# Altium PCB PCBMC.PcbDoc
Units mil, origin at the board's own origin, x right, y up, seen from the top; angles counter-clockwise.
Board outline 2490 x 3315 mil, 2 copper layers (Top Layer, Bottom Layer); 24 components, 29 nets, 150 pads, 27 vias.
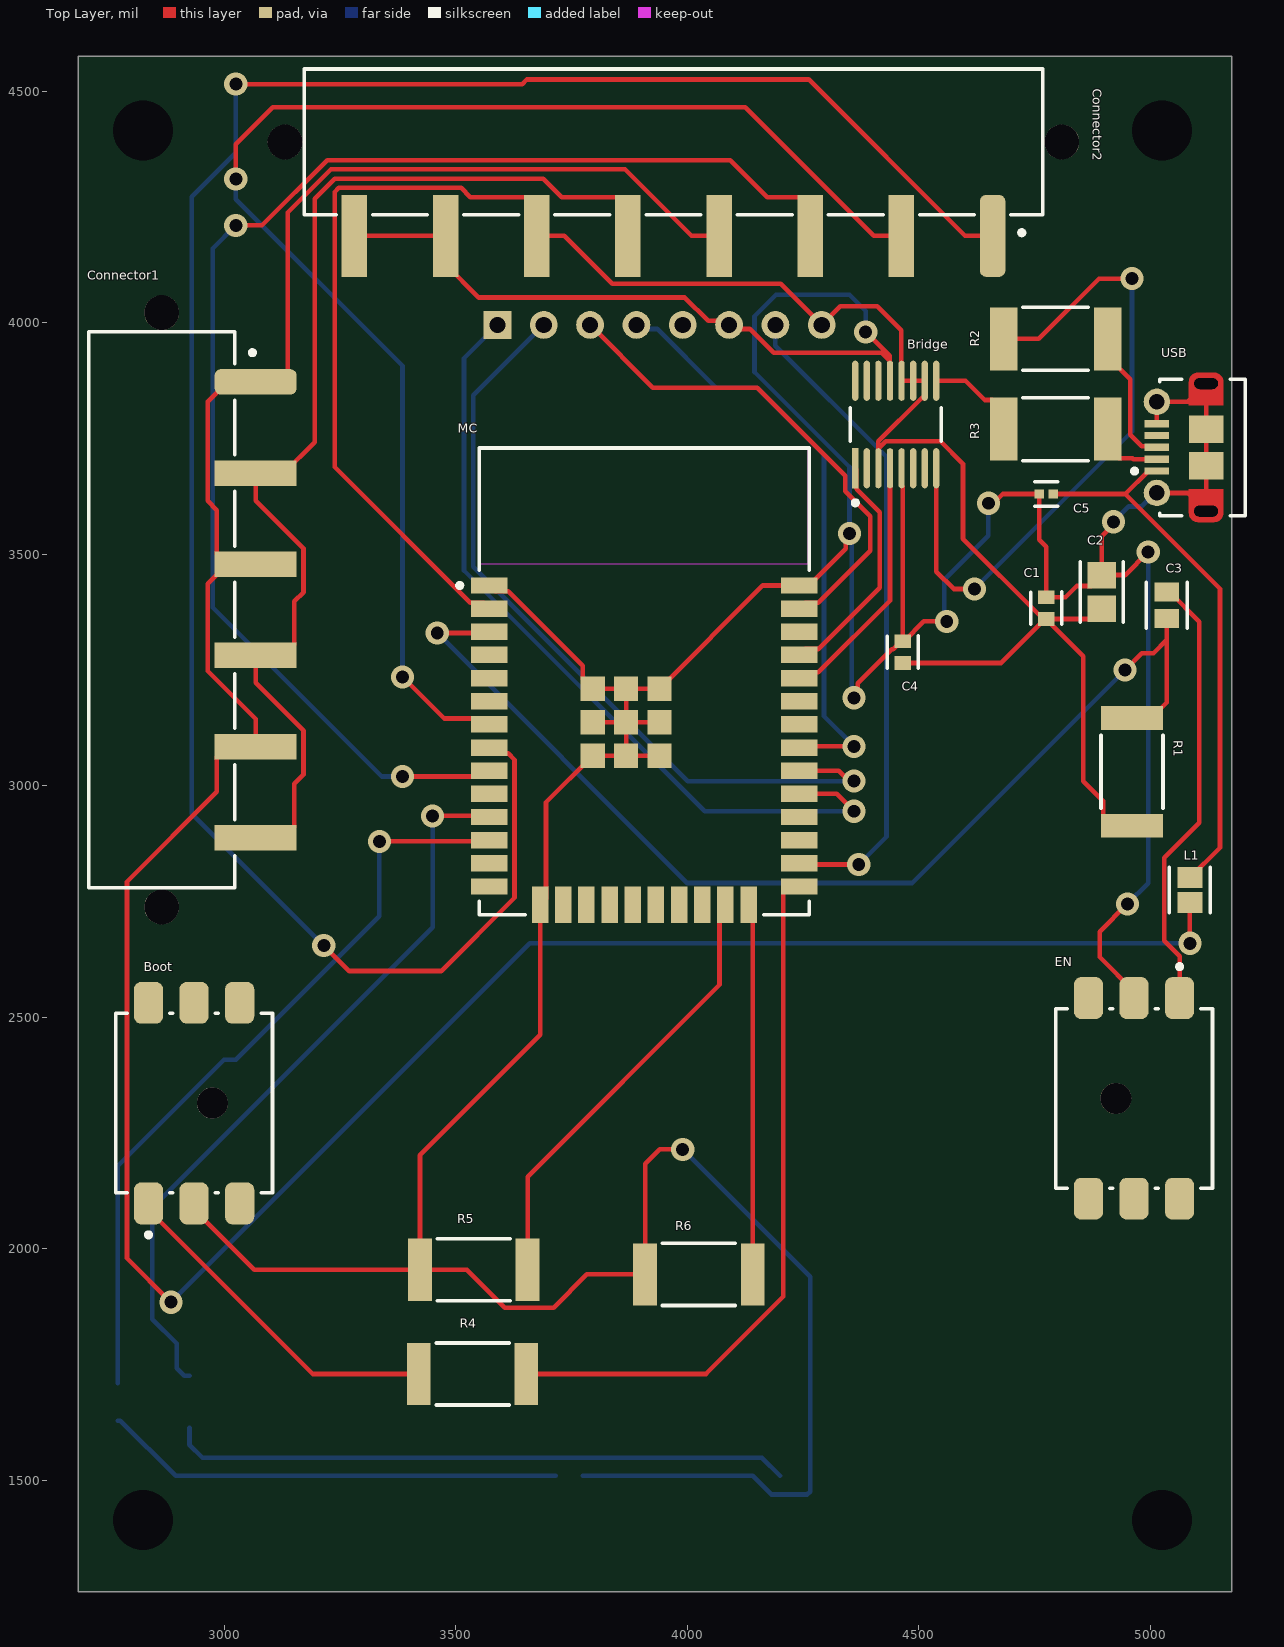
[diagram p0: Top Layer view]
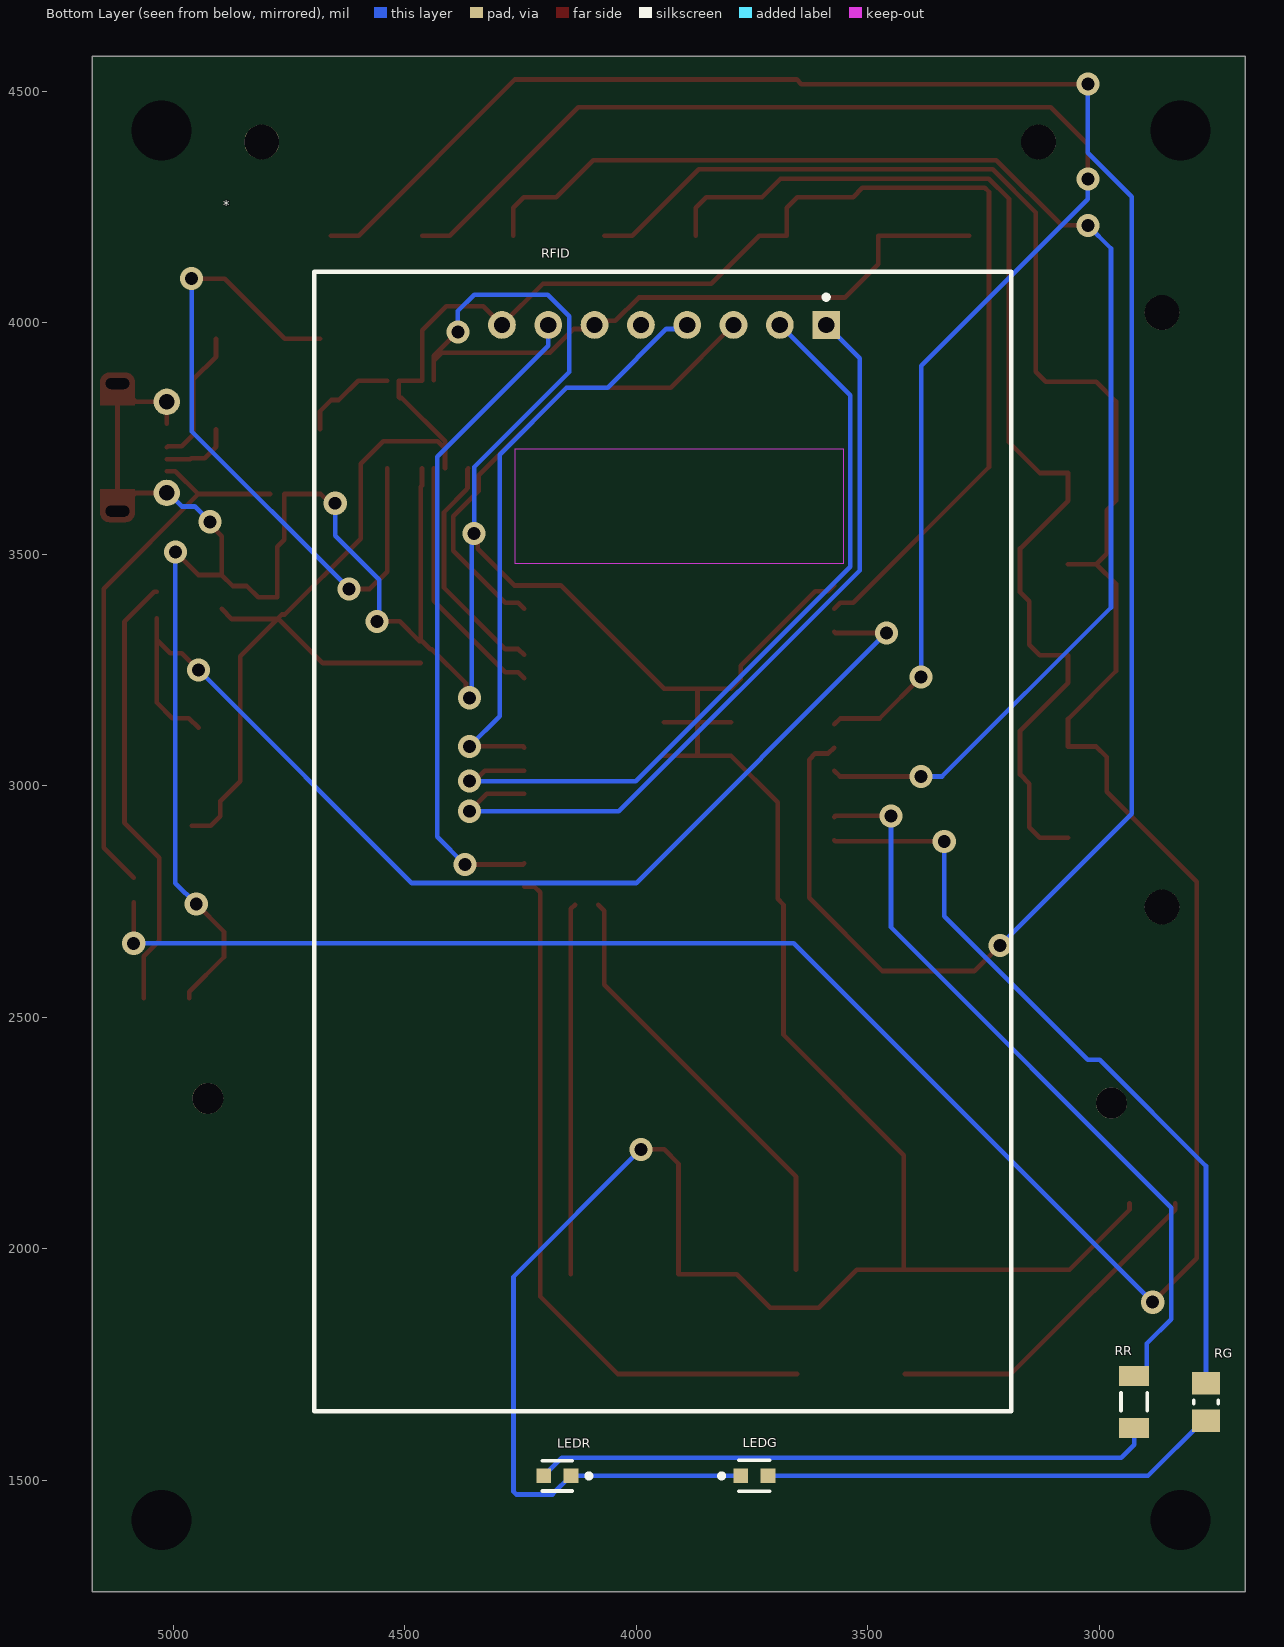
[diagram p1: Bottom Layer view, seen from below]
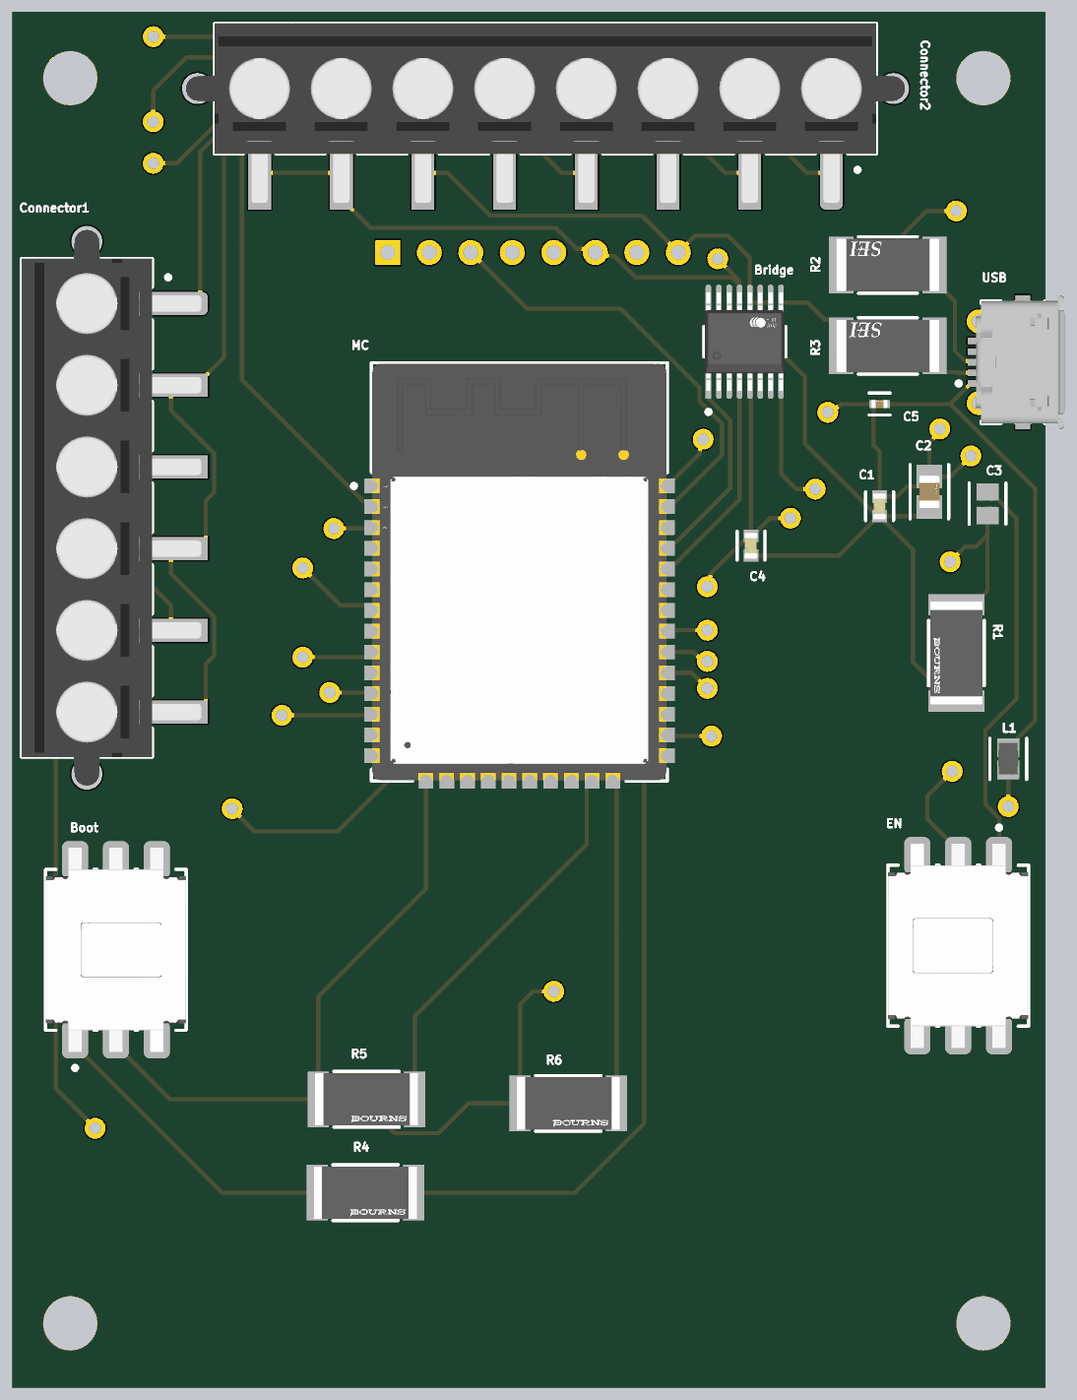
[diagram p2: 3D render of the assembled board from above, using the file's embedded part models]

## Layer stack, top to bottom
Top Solder: solder mask 0.4, Solder Resist, Dk 3.5
Top Layer: signal copper 1.4
Dielectric 1: dielectric 12.6, FR-4, Dk 4.8
Bottom Layer: signal copper 1.4
Bottom Solder: solder mask 0.4, Solder Resist, Dk 3.5

## Board outline
2685,1260 5175,1260 5175,4575 2685,4575

## Design rules (kind name [scope] priority, off if disabled: settings)
Clearance [All] p1: gap=5 ignorepadtopadclearanceinfootprint=FALSE except(0: Arc-Hole Track-Hole SMDPad-Hole THPad-Hole Via-Hole Fill-Hole Poly-Hole Region-Hole Text-Hole)
HoleSize [All] p1: absolutevalues=TRUE maxlimit=250 minlimit=10 maxpercent=80.000 minpercent=20.000
PolygonConnect [All] p1: connectstyle=Relief reliefconductorwidth=10 reliefentries=4 polygonreliefangle="90 Angle" airgapwidth=10
RoutingVias [All] p1: holewidth=28 width=50 viastyle="Through Hole" minholewidth=28 minwidth=50 maxholewidth=28 maxwidth=50
SolderMaskExpansion [All] p1: expansion=4 istentingtop=FALSE
Width [All] p1: maxlimit=20 minlimit=5 preferedwidth=10 minimp=50.000000 maximp=50.000000 favimp=50.000000
29 further rules are at their usual default settings.

## Components (designator, comment, footprint, x,y, rotation, side; value= is the part's Value field where it differs from the comment)
* "RFID" PCBComponent_1 4290,3995 r180 bottom
Boot "ESB-33535A" FP-ESB-33535A-MFG 2935,2315 r90 top
Bridge "FT230XS-R" FP-SSOP-16-MFG 4450,3780 r90 top
C1 "C0603C104K5RACTU" FP-C0603C-CF-MFG 4775,3383.62 r90 top value="0.10 μF"
C2 "GRM21BR61H106KE43L" FP-GRM21B-0_2-e0_2_0_7-IPC_A 4895,3418.55 r90 top
C3 "CL21B105KBFNNNG" FP-CL21-IPC_C 5035,3390 r270 top
C4 "C0603C104K5RACTU" FP-C0603C-CF-MFG 4465,3288.62 r90 top value="0.10 μF"
C5 "CL05B103KB5NNNC" FP-CL165-IPC_C 4775,3630 r180 top
Connector1 "691709710306" 691709710306 2865,3380 r270 top
Connector2 "691709710308" 691709710308 3970,4390 r180 top
EN "ESB-33535A" FP-ESB-33535A-MFG 4964.37,2325 r270 top
L1 "ILHB0805ER601V" FP-ILHB-0805-IPC_C 5085,2775 r270 top
LEDG "LTST-C190GKT" FP-LTST-C190GKT-MFG 3745,1510 r180 bottom
LEDR "LTST-C190KRKT" FP-LTST-C190KRKT-MFG 4170.47,1510 r0 bottom
MC "ESP32-WROOM-32" FP-ESP32-WROOM-32-MFG 3907.13,3225.43 r0 top
R1 "CR2512-JW-103ELF" FP-CR2512-IPC_B 4960,3030 r270 top
R2 "RMCF2512JT27R0" FP-RMCF2512-IPC_B 4795,3965 r180 top
R3 "RMCF2512JT27R0" FP-RMCF2512-IPC_B 4795,3770 r180 top
R4 "CR2512-JW-103ELF" FP-CR2512-IPC_B 3536.17,1730 r0 top
R5 "CR2512-JW-103ELF" FP-CR2512-IPC_B 3538.83,1955 r0 top
R6 "CR2512-JW-103ELF" FP-CR2512-IPC_B 4025,1945 r0 top
RG "RK73B2ATTD390J" RESC2013X60X30ML20T20 2770,1669.65 r90 bottom
RR "ERJ-8ENF52R3V" RESC3216X70X50NL05T20 2925,1670 r90 bottom
USB "105017-0001" USB-MICRO-B_V 5066.85,3730.63 r90 top

## Footprints (in the part's own frame and the unit in brackets; to place one, negate y for a bottom-side part, rotate by r counter-clockwise, add the part's x,y. Pads: shape width x height; smd on the part's side, far side on the other; paste and mask are expansions set on the pad)
691709710306 [mm] "Horizontal Entry SMT with Pressure Clamp, pitch 5mm, 06p"
  rrect50% 1.4x4.5 smd: 1(-12.5,5.15)
  rect 1.4x4.5 smd: 2(-7.5,5.15) 3(-2.5,5.15) 4(2.5,5.15) 5(7.5,5.15) 6(12.5,5.15)
  round 1.9 hole 1.9 unplated: M1(-16.3,0) M2(16.3,0)
  silkscreen extent -15.25,-4 15.25,5.1, body extent -17,-4 17,7, height 9.95
691709710308 [mm] "Horizontal Entry SMT with Pressure Clamp, pitch 5mm, 08p"
  rrect50% 1.4x4.5 smd: 1(-17.5,5.15)
  rect 1.4x4.5 smd: 2(-12.5,5.15) 3(-7.5,5.15) 4(-2.5,5.15) 5(2.5,5.15) 6(7.5,5.15) 7(12.5,5.15) 8(17.5,5.15)
  round 1.9 hole 1.9 unplated: M1(-21.3,0) M2(21.3,0)
  silkscreen extent -20.25,-4 20.25,5.1, body extent -22,-4 22,7, height 9.95
FP-C0603C-CF-MFG [mm]
  rect 0.75x0.9 smd paste+0 mask+0: 1(-0.6,0) 2(0.6,0)
  silkscreen extent -0.87,-0.85 0.88,0.85, body extent -1.2,-0.6 1.2,0.6, height 0.25
FP-CL21-IPC_C [mil]
  rect 41.52x53.39 smd paste+0 mask+0: 1(-28.57,0) 2(28.57,0)
  silkscreen extent -49,-44 49,44, body extent -53,-32 53,32, height 10
FP-CL165-IPC_C [mil]
  rect 20.29x18.6 smd paste+0 mask+0: 1(-14.9,0) 2(14.9,0)
  silkscreen extent -25,-27 25,27, body extent -29,-15 29,15, height 10
FP-CR2512-IPC_B [mil]
  rect 51.36x134.1 smd paste+0 mask+0: 1(-116.17,0) 2(116.17,0)
  silkscreen extent -79,-67 79,67, body extent -152,-77 152,77, height 10
FP-ESB-33535A-MFG [mm]
  rrect50% 2.3x1.6 smd paste+0 mask+0: 1(-5.5,2.5) 2(-5.5,0) 3(-5.5,-2.5) 4(5.5,-2.5) 5(5.5,0) 6(5.5,2.5)
  round 1.7 hole 1.7 unplated paste-1000 mask+0: ""(0,-1)
  silkscreen extent -7.35,-4.3 4.92,4.3, body extent -6.75,-4.4 6.75,4.4, height 0.25
FP-ESP32-WROOM-32-MFG [mm]
  rect 2x0.9 smd paste+0 mask+0: 1(-8.5,5.26) 2(-8.5,3.99) 3(-8.5,2.72) 4(-8.5,1.45) 5(-8.5,0.18) 6(-8.5,-1.09) 7(-8.5,-2.36) 8(-8.5,-3.63) 9(-8.5,-4.9) 10(-8.5,-6.17) 11(-8.5,-7.44) 12(-8.5,-8.71) 13(-8.5,-9.98) 14(-8.5,-11.25) 25(8.5,-11.25) 26(8.5,-9.98) 27(8.5,-8.71) 28(8.5,-7.44) 29(8.5,-6.17) 30(8.5,-4.9) 31(8.5,-3.63) 32(8.5,-2.36) 33(8.5,-1.09) 34(8.5,0.18) 35(8.5,1.45) 36(8.5,2.72) 37(8.5,3.99) 38(8.5,5.26)
  rect 0.9x2 smd paste+0 mask+0: 15(-5.715,-12.25) 16(-4.445,-12.25) 17(-3.175,-12.25) 18(-1.905,-12.25) 19(-0.635,-12.25) 20(0.635,-12.25) 21(1.905,-12.25) 22(3.175,-12.25) 23(4.445,-12.25) 24(5.715,-12.25)
  rect 1.33x1.33 smd paste+0 mask+0: 39(-2.835,-4.075) 39(-2.835,-2.24) 39(-2.835,-0.405) 39(-1,-4.075) 39(-1,-2.24) 39(-1,-0.405) 39(0.835,-4.075) 39(0.835,-2.24) 39(0.835,-0.405)
  Keep-Out Layer region: -9,6.45 9,6.45 9,12.75 -9,12.75
  Keep-Out Layer region: -9,6.45 9,6.45 9,12.75 -9,12.75
  silkscreen extent -10.25,-12.8 9.05,12.8, body extent -9.6,-13.35 9.6,12.9, height 0.25
FP-GRM21B-0_2-e0_2_0_7-IPC_A [mil]
  rect 57.27x61.27 smd paste+0 mask+0: 1(-36.45,0) 2(36.45,0)
  silkscreen extent -65,-46 65,46, body extent -85,-50 85,50, height 10
FP-ILHB-0805-IPC_C [mil]
  rect 45.45x53.39 smd paste+0 mask+0: 1(-26.61,0) 2(26.61,0)
  silkscreen extent -49,-44 49,44, body extent -53,-32 53,32, height 10
FP-LTST-C190GKT-MFG [mm]
  rect 0.8x0.8 smd paste+0 mask+0: 1(-0.75,0) 2(0.75,0)
  silkscreen extent -1.92,-0.85 0.85,0.85, body extent -0.8,-0.4 0.8,0.4, height 0.9
FP-LTST-C190KRKT-MFG [mm]
  rect 0.8x0.8 smd paste+0 mask+0: 1(-0.75,0) 2(0.75,0)
  silkscreen extent -1.85,-0.82 0.82,0.82, body extent -0.8,-0.4 0.8,0.4, height 0.9
FP-RMCF2512-IPC_B [mil]
  rect 59.22x136.02 smd paste+0 mask+0: 1(-112.24,0) 2(112.24,0)
  silkscreen extent -71,-68 71,68, body extent -152,-78 152,78, height 10
FP-SSOP-16-MFG [mm]
  rect 2.2x0.345 smd paste+0 mask+0: 1(-2.4,2.222)
  rrect100% 2.2x0.345 smd paste+0 mask+0: 2(-2.4,1.587) 3(-2.4,0.952) 4(-2.4,0.317) 5(-2.4,-0.318) 6(-2.4,-0.953) 7(-2.4,-1.588) 8(-2.4,-2.222) 9(2.4,-2.222) 10(2.4,-1.587) 11(2.4,-0.952) 12(2.4,-0.317) 13(2.4,0.318) 14(2.4,0.953) 15(2.4,1.588) 16(2.4,2.222)
  silkscreen extent -4.42,-2.5 0.92,2.5, body extent -3.6,-2.75 3.6,2.75, height 0.25
PCBComponent_1 [mil]
  rect 60x60 hole 35: 1(700,0)
  round 60 hole 35: 2(600,0) 3(500,0) 4(400,0) 5(300,0) 6(200,0) 7(100,0) 8(0,0)
  silkscreen extent -405,-2345 1100,115
RESC2013X60X30ML20T20 [mm] "Chip Resistor, 2-Leads, Body 2.00x1.25mm, IPC Low Density"
  rect 1.25x1.55 smd: 1(-1.025,0) 2(1.025,0)
  silkscreen extent -0.1,-0.67 0.1,0.67, body extent -1.1,-0.72 1.1,0.72, height 0.6
RESC3216X70X50NL05T20 [mm] "Chip Resistor, 2-Leads, Body 3.20x1.60mm, IPC Medium Density"
  rect 1.1x1.65 smd: 1(-1.425,0) 2(1.425,0)
  silkscreen extent -0.5,-0.72 0.5,0.72, body extent -1.63,-0.82 1.62,0.82, height 0.7
USB-MICRO-B_V [mm] "USB, MICRO B, Body 7.491x4.695 mm, Pitch 0.65 mm"
  rect 0.4x1.35 smd: 1(-1.3,1.35) 2(-0.65,1.35) 3(0,1.35) 4(0.65,1.35) 5(1.3,1.35)
  round 1.45 hole 0.85: 6(-2.5,1.35) 7(2.5,1.35)
  rrect50% 0x0 hole 0.6 slot 1.3 at 90 deg: 8(-3.5,-1.35) 11(3.5,-1.35)
  rect 1.5x1.9 smd: 9(-1,-1.35) 10(1,-1.35)
  Top Layer circle w0.5: c3.6,-0.9 r0.25
  Top Layer circle w0.5: c3.6,-1.8 r0.25
  Top Layer circle w0.5: c-3.6,-0.9 r0.25
  Top Layer circle w0.5: c-3.6,-1.8 r0.25
  Top Layer region: -2.3,-2.3 -2.3,-0.4 -3.6,-0.4 -3.6,-2.3
  Top Layer region: 2.3,-0.4 2.3,-2.3 3.6,-2.3 3.6,-0.4
  Top Layer region: 3.6,-0.9 3.6,-1.8 4.1,-1.8 4.1,-0.9
  Top Layer region: -3.6,-1.8 -3.6,-0.9 -4.1,-0.9 -4.1,-1.8
  silkscreen extent -3.75,-3.5 3.75,2.7, body extent -4.1,-3.9 4.1,1.5, height 2.67

## Part data
*: library part Component_1
Boot EN: library part CMP-05613-000001-1, "SWITCH PUSH DPDT 0.2A 14V", Case/Package=SMD/SMT, Max Voltage Rating (DC)=14V, Mount="Surface Mount", Packaging="Tape and Reel", Radiation Hardening=No, Termination=Solder, Throw Configuration=DPDT
Bridge: library part CMP-0248-00026-3, "IC USB SERIAL BASIC UART 16SSOP", Case/Package=SSOP, Max Operating Temperature=85°C, Max Supply Voltage=5.5V, Min Operating Temperature=-40°C, Min Supply Voltage=2.97V, Operating Supply Current=8mA, Operating Supply Voltage=5V, Package Quantity=3000, Data Rate=12Mbps, Height=0.059inch, Interface=UART, Length=5mm, Mount="Surface Mount", Number of Channels=1, Number of Pins=16, Packaging="Tape and Reel", Weight=0.004586oz, Width=0.157inch
C1 C4: library part CMP-2006-03061-2, "CAP CER 0.1UF 50V X7R 0603", Capacitance="0.10 μF", Manufacturer=KEMET, Package=C0603C-CF, Temperature="-55°C to +125°C", Temperature Characteristic=X7R, Temperature Coefficient=30ppm/°C, Temperature Range High=+125°C, Temperature Range Low=-55°C, Tolerance=0.1, Voltage Rating="50 V", Automotive=Yes, Automotive Grade="Grade 1", Category=Cap, ComponentLink2Description=Datasheet, ComponentLink2URL=https://api.kemet.com/component-edge/download/datasheet/C0603C100J5GACAUTO.pdf, Device Class L1="Passive Components", Device Class L2=Capacitors, Device Class L3="Ceramic Capacitors", Digikey Description="CAP CER 0.1UF 50V X7R 0603", Height=0.87mm, Lead Free=Yes, Manufacturer Part Number=C0603C104K5RACTU, Material=Ceramic, Octopart=https://octopart.com/c0603c104k5ractu-kemet-139244, RoHS=TRUE
C2: library part CMP-06035-004402-1, "Chip Multilayer Ceramic Capacitors for General Purpose, 0805, 10uF, X5R, 15%, 10%, 50V", Capacitance=10uF, Dielectric=X5R, Tolerance=10%, Voltage Rating (DC)=50V, Length=2mm, Thickness=1.25mm, Width=1.25mm
C3: library part CMP-13271-001433-1, "CL21 Series 0805 1uF 50V ±10% Tolerance X7R Multilayer Ceramic Chip Capacitor", Capacitance=1uF, Case Code (Imperial)=0805, Case Code (Metric)=2012, Dielectric=X7R, Max Operating Temperature=125°C, Min Operating Temperature=-55°C, Package Quantity=3000, Tolerance=10%, Voltage=50V, Case/Package=0805, Contact Plating=Tin, Depth=1.25mm, Length=2mm, Material=Ceramic, Mount="Surface Mount", Packaging="Tape and Reel", Termination=Wraparound, Thickness=0.053inch, Voltage Rating=50V, Width=0.049inch
C5: library part CMP-13271-000387-1, "Cap Ceramic 10nF 50V X7R ±10% SMD 0402 +125°C Paper T/R", Capacitance=10nF, Case Code (Imperial)=0402, Case Code (Metric)=1005, Dielectric=X7R, Max Operating Temperature=125°C, Min Operating Temperature=-55°C, Package Quantity=1, Tolerance=10%, Voltage=50V, Case/Package=0402, Contact Plating=Tin, Depth=0.5mm, Height=0.5mm, Lead Free="Lead Free", Length=1mm, Material=Ceramic, Mount="Surface Mount", Packaging="Tape and Reel", Radiation Hardening=No, Thickness=0.022inch, Voltage Rating=50V, Voltage Rating (DC)=50V, Width=0.02inch
Connector1: library part CMP-1502-03339-2, Color=Black, Current=6A, Flammability Rating="UL94 V-0", Max Operating Temperature=130°C, Min Operating Temperature=-40°C, Voltage=300V, Connector Type=Screw, Contact Material=Nickel, Contact Plating=Tin, Current Rating=6A, Height=10.2mm, Housing Material=Nylon, Lead Pitch=5mm, Length=30mm, Mount="Surface Mount", NexarPartId=34171773, Number of contacts=6, Number of Levels=1, Number of Pins=6, Number of Positions=6, Number of Positions Per Level=6, Number of Rows=1, Packaging="Tape & Reel (TR)", Pitch=5mm, Plating=Steel, REACH SVHC=Unknown, RoHS=Compliant, Termination=Screw, Voltage Rating=300V, Wire Gauge (Max)=30AWG, Wire Gauge (Min)=14AWG, Wire/Cable Gauge=30AWG
Connector2: library part CMP-1502-03340-2, Color=Black, Current=6A, Flammability Rating="UL94 V-0", Max Operating Temperature=130°C, Min Operating Temperature=-40°C, Voltage=300V, Connector Type=Screw, Contact Plating=Tin, Current Rating=6A, Housing Material=Nylon, Lead Pitch=5mm, Length=40mm, Mount="Surface Mount", NexarPartId=34171774, Number of contacts=8, Number of Levels=1, Number of Pins=8, Number of Positions=8, Number of Positions Per Level=8, Packaging="Tape & Reel (TR)", Pitch=5mm, Plating=Steel, REACH SVHC=Unknown, RoHS=Compliant, Termination=Screw, Voltage Rating=300V, Wire Gauge (Max)=30AWG, Wire Gauge (Min)=14AWG, Wire/Cable Gauge=30AWG
L1: library part CMP-02428-000001-1, "FERRITE BEAD 600 OHM 0805 1LN", Impedance At Frequency="600Ω @ 100MHz", Manufacturer=Vishay, Package=ILHB-0805, Rms Current=2000mA, Series Resistance=0.1Ω, Temperature="-55°C to +125°C", Temperature Range High=+125°C, Temperature Range Low=-55°C, Test Frequency=100MHz, Tolerance=25%, Automotive=No, Category=FBead, ComponentLink2Description=Datasheet, ComponentLink2URL=http://www.vishay.com/docs/34102/ilhb.pdf, Device Class L1="Passive Components", Device Class L2="EMI / RFI Components", Device Class L3="Ferrite Beads and Chips", Digikey Description="FERRITE BEAD 600 OHM 0805 1LN", Height=1.1mm, Ipc Land Pattern Name=CAPC200125X90, Lead Free=Yes, Manufacturer Part Number=ILHB0805ER601V, Mouser Description="Ferrite Beads Multi-Layer High Current 600Ohm 25% 100MHz 2A 100mOhm DCR 0805 T/R", Octopart=https://octopart.com/ilhb0805er601v-vishay-39650184, RoHS=TRUE, Shielding=true
LEDG: library part CMP-22017-000005-2, "LED GREEN CLEAR CHIP SMD", Case Code (Imperial)=0603, Case Code (Metric)=1608, Color=Green, Forward Current=30mA, Forward Voltage=2.1V, Lens Color=Colorless, Max Operating Temperature=85°C, Min Operating Temperature=-55°C, Package Quantity=1, Power Dissipation=100mW, Reverse Voltage=5V, Test Current=10mA, Voltage=2V, Case/Package=0603, Depth=0.8mm, Dominant Wavelength=569nm, Height=0.8mm, Illumination Color=Green, Lead Free="Lead Free", Length=1.6mm, Lens Style=Clear, Lens Transparency=Clear, Luminous Intensity=6mcd, Mount="Surface Mount", Number of Elements=1, Number of LEDs=1, Number of Pins=2, Packaging="Tape and Reel", Power Rating=100mW, Radiation Hardening=No, Viewing Angle=130°, Wavelength=565nm, Width=0.8mm
LEDR: library part CMP-1674-00011-2, "LED RED CLEAR CHIP SMD", Case Code (Imperial)=0603, Case Code (Metric)=1608, Color=Red, Forward Current=30mA, Forward Voltage=2.4V, Lens Color=Colorless, Max Operating Temperature=85°C, Min Operating Temperature=-55°C, Package Quantity=1, Power Dissipation=75mW, Reverse Voltage=5V, Test Current=20mA, Case/Package=0603, Depth=0.8mm, Dominant Wavelength=631nm, Height=0.8mm, Illumination Color=Red, Lead Free="Lead Free", Length=1.6mm, Lens Style=Diffused, Lens Transparency=Clear, Luminous Intensity=54mcd, Mount="Surface Mount", Number of Elements=1, Number of LEDs=1, Number of Pins=2, Packaging="Tape and Reel", Power Rating=75mW, Radiation Hardening=No, Viewing Angle=130°, Wavelength=639nm, Width=0.8mm
MC: library part CMP-194065-000008-1, "RX TXRX MOD WIFI SURFACE MOUNT", Case/Package=SMD/SMT, Frequency=2.5GHz, Max Operating Temperature=85°C, Min Operating Temperature=-40°C, Operating Supply Voltage=3.6V, Package Quantity=550, Data Rate=150Mbps, Mount="Surface Mount", Packaging="Cut Tape", Sensitivity=-98dBm, Weight=0.088185oz
R1 R4 R5 R6: library part CMP-1018-00098-2, "Thick Film Chip Resistors 2512 10kΩ 1W 5% 200ppm/°C", Case Code (Imperial)=2512, Case Code (Metric)=6332, Max Operating Temperature=155°C, Max Power Dissipation=1W, Min Operating Temperature=-55°C, Package Quantity=4000, Resistance=10kR, Temperature Coefficient=200ppm/°C, Tolerance=5%, Voltage Rating=200V, Case/Package=2512, Composition="Thick Film", Contact Plating=Tin, Depth=3.1mm, Height=0.03inch, Length=6.3mm, Military Standard=Not, Mount="Surface Mount", Number of Terminations=2, Packaging="Tape and Reel", Power Rating=1W, Radiation Hardening=No, Termination=SMD/SMT, Weight=0.001429oz, Width=0.122inch
R2 R3: library part CMP-26527-001789-1, "27Ω ±5% 1W 2512 Thick Film Chip Resistor AEC-Q200 compliant", Case Code (Imperial)=2512, Case Code (Metric)=6432, Max Operating Temperature=155°C, Max Power Dissipation=1W, Min Operating Temperature=-55°C, Package Quantity=4000, Resistance=27R, Resistor Type="Thick Film", Temperature Coefficient=100ppm/°C, Tolerance=5%, Case/Package=2512, Construction=Rectangular, Contact Plating=Tin, Depth=3.2mm, Features="Automotive AEC-Q200", Height=0.028inch, Lead Free="Lead Free", Length=0.248inch, Military Standard=Not, Mount="Surface Mount", Number of Terminations=2, Packaging="Tape and Reel", Power Rating=1W, Radiation Hardening=No, RoHS Compliant=Yes, Series=RMCF, Size Code=2512, Width=0.126inch
RG: library part CMP-2001-04588-1, Manufacturer="KOA Speer", Part Number=RK73B2ATTD390J
RR: library part CMP-2003-00414-1, Manufacturer=Panasonic, Part Number=ERJ-8ENF52R3V
USB: library part CMP-2000-05827-1, "Micro-USB B Receptacle, Right Angle, Bottom Mount, Surface Mount, with Solder Tabs, -30 to 85 degC, 5-Pin USB, RoHS, Tape and Reel", Manufacturer=Molex, Package Description="5-Leads USB, Micro B, Body 7.5 x 5 mm, Pitch 0.65 mm", Package Reference=MICRO-B, Package Version="Rev. F, 12/2012", Standard Package=1, Voltage - Max=30V, 3D Model=105017-0001.stp, Catalog Drawings=1050170001, Category=Connectors,Interconnects, Circuits=5, Connector Type=USB-microB, Datasheet URL=http://www.molex.com/elqNow/elqRedir.htm?ref=http://www.molex.com/webdocs/datasheets/pdf/en-us/1050170001_IO_CONNECTORS.pdf, Datasheet Version=03/2016, Family=USB,DVI,HDMIConnectors, Featured Product=Micro-USBConnectorsUSBConnectors, Features=Shielded,SolderRetention, Gender=Receptacle, Ingress Protection=-, Manufacturer URL=http://www.molex.com/, Mating Products=WM17145-ND-CABLEMICROUSBBTOSTDA1.0MWM17147-ND-CABLEMICROUSBBTOSTDA2.0MWM17146-ND-CABLEMICROUSBBTOSTDA1.5M, Mounting Technology=SurfaceMount, Mounting Type=BoardCutout,SurfaceMount,RightAngle, Number of contacts=5, Online Catalog=Molex-MicroUSB, Other Names=WM1399DKR, Package URL=http://www.molex.com/pdm_docs/sd/1050170001_sd.pdf, Packaging=Digi-Reel®, PCN Assembly/Origin=ResinSupplier21/Oct/2015, RoHS Information=1050170001CertofCompliance, Series=-, Specifications=-

## Free pads (board coordinates)
  round 60 hole 130: 3(2825,1415) 3(2825,4415) 3(5025,1415) 3(5025,4415)

## Via types
v1: diameter 50, hole 28, Top Layer to Bottom Layer, 27 vias

## Nets (pads, with @x,y where several pads share a name; then routed paths per layer and width w, separated by ;. In a path a pad name is that pad's centre, name@x,y a point inside that pad or via, vN(x,y) a via of type N, cw(c..) or ccw(c..) an arc to the next point about the centre after c; other vN are vias at no path point)
Net*_1: *.1 MC.29 | length 1751.3
  Top Layer w10: MC.29 4322.48,2982.52 v1(4360,2945)
  Bottom Layer w10: *.1 3517.8,3922.8 3517.8,3464.87 4037.67,2945 v1(4360,2945)
Net*_2: *.2 MC.30 | length 1726.5
  Top Layer w10: MC.30 4326.66,3032.52 4349.18,3010 v1(4360,3010)
  Bottom Layer w10: *.2 3537.8,3842.8 3537.8,3473.16 4000.95,3010 v1(4360,3010)
Net*_3: *.3 MC.37 | length 1075
  Top Layer w10: *.3 3925.48,3859.52 4150.55,3859.52 4340.71,3669.36 4340.71,3635.99 4395,3581.7 4395,3507.45 4282.79,3395.24 4254.49,3395.24 MC.37
Net*_4: *.4 MC.31 | length 1297.2
  Top Layer w10: MC.31 4244.25,3085 v1(4360,3085)
  Bottom Layer w10: *.4 3898.64,3986.36 3935,3986.36 4061.84,3859.52 4150.55,3859.52 4295,3715.07 4295,3150 v1(4360,3085)
Net*_6: *.6 Boot.2 Bridge.5 Bridge.13 C1.2 C2.2 C4.2 C5.2 Connector2.7 Connector2.8 EN.2 LEDG.1 LEDR.1 MC.1 MC.15 MC.38 MC.39 R5.1 R6.1 USB.5 USB.6 USB.7 USB.8 USB.9 USB.10 USB.11 | length 11611.7
  Top Layer w10: Boot.2 2935,2084.69 3064.69,1955 R5.1 ; Connector2.8 Connector2.7 3477.87,4126.22 3549.98,4054.11 3994.53,4054.11 4045,4003.64 4081.36,4003.64 *.6 4098.64,3986.36 4135,3986.36 4186.36,3935 4419.32,3935 Bridge.13@4436.81,3917.51 ; MC.1 3585.2,3419.8 3613.5,3419.8 3774.33,3258.97 3774.33,3230.67 3795.51,3209.49 MC.39@3867.76,3209.49 ; MC.39@3795.51,3137.24 MC.39@3867.76,3137.24 ; MC.39@3940,3065 MC.39@3867.76,3065 ; MC.39@3940,3137.24 MC.39@3867.76,3137.24 ; v1(3990,2215) 3940,2215 3908.83,2183.83 R6.1 3783.17,1945 3711.12,1872.95 3606.14,1872.95 3524.09,1955 R5.1 ; v1(4350,3545) 4342.35,3537.35 4342.35,3511.44 4263.43,3432.52 4163.03,3432.52 3940,3209.49 MC.39@3867.76,3209.49 ; v1(4360,3190) 4367.65,3197.65 4367.65,3221.35 4441.07,3294.76 4444.57,3294.76 4462.05,3312.24 C4.2 ; v1(4385,3980) 4436.81,3928.19 Bridge.13@4436.81,3917.51 ; Bridge.13@4436.81,3875.17 Bridge.13@4436.81,3917.51 ; Bridge.5 4462.5,3648.03 4465,3645.53 C4.2 ; v1(4560,3355) 4510.71,3355 4467.95,3312.24 C4.2 ; v1(4650,3610) 4660.82,3610 4680.82,3630 C5.2 4760.1,3531.14 4775,3516.23 C1.2 4816.48,3407.24 4840.6,3431.37 4871.37,3431.37 C2.2 ; v1(4920,3570) 4920,3563.43 4895,3538.43 C2.2 ; v1(4950,2745) 4890,2685 4890,2630.31 4965,2555.31 EN.2@4965,2541.54 ; v1(4995,3505) 4945,3455 C2.2 ; USB.6 5080.63,3632.2 USB.8 USB.9 USB.10 USB.11 5080.63,3829.06 USB.7 USB.5 ; R5.1 3422.66,2202.66 3682.13,2462.13 MC.15 3694.84,2755.87 3694.84,2964.33 3795.51,3065 MC.39@3867.76,3065 ; MC.39@3867.76,3065 MC.39@3867.76,3137.24 ; MC.39@3867.76,3137.24 MC.39@3867.76,3209.49
  Bottom Layer w10: LEDG.1 LEDR.1 4180.94,1470 4259.14,1470 4265,1475.86 4265,1940 v1(3990,2215) ; v1(4360,3190) 4355,3195 4355,3540 v1(4350,3545) 4350,3688.36 4145,3893.36 4145,4013.64 4191.36,4060 4350,4060 4385,4025 v1(4385,3980) ; v1(4560,3355) 4555,3360 4555,3444.59 4650,3539.59 v1(4650,3610) ; v1(4920,3570) 4953.13,3603.13 4981.2,3603.13 5010.27,3632.2 USB.6 ; v1(4950,2745) 4995,2790 v1(4995,3505)
Net*_7: *.7 MC.26 | length 1418.5
  Top Layer w10: MC.26 4244.29,2830 v1(4370,2830)
  Bottom Layer w10: *.7 4190,3950 4430,3710 4430,2890 v1(4370,2830)
Net*_8: *.8 Bridge.3 Bridge.10 Bridge.11 Bridge.12 C1.1 C2.1 C4.1 Connector2.6 MC.2 R1.2 | length 4560.7
  Top Layer w10: MC.2 3559.76,3395.24 3531.46,3395.24 3238.46,3688.24 3238.46,4282.04 3247.25,4290.83 3511.65,4290.83 3531.65,4270.83 3652.17,4270.83 3674.72,4248.27 Connector2.6 3734.22,4187.24 3837.8,4083.66 4201.34,4083.66 *.8 4330,4035 4410,4035 4461.81,3983.19 4461.81,3875.17 Bridge.12 Bridge.11 Bridge.10 4512.5,3838.94 4510.85,3837.29 4505.97,3837.29 4412.5,3743.82 Bridge.3 4413.19,3686.2 4413.19,3728.53 4428.47,3743.82 4546.53,3743.82 4595,3695.35 4595,3533.55 4758.79,3369.76 4765.24,3369.76 C1.1 ; C4.1 4677.05,3265 4772.05,3360 C1.1 ; C2.1 4872.9,3360 C1.1 ; R1.2 4918.63,2913.83 4897.95,2934.51 4897.95,2967.05 4855,3010 4855,3280 C1.1
NetBoot_1: Boot.1 R4.1 | length 744.1
  Top Layer w10: Boot.1 2836.57,2084.69 3191.26,1730 R4.1
NetBridge_1: Bridge.1 MC.35 | length 513.1
  Top Layer w10: MC.35 4254.49,3295.24 4282.79,3295.24 4415,3427.45 4415,3590.68 4365.71,3639.97 4365.71,3641.35 4364.29,3642.76 4364.29,3683.72 Bridge.1
NetBridge_4: Bridge.4 MC.34 | length 550.6
  Top Layer w10: MC.34 4254.49,3245.24 4282.79,3245.24 4437.5,3399.95 Bridge.4
NetBridge_8: Bridge.8 R2.2 | length 1463
  Top Layer w10: Bridge.8 4537.5,3462.5 4575,3425 v1(4620,3425) ; R2.2 4758.68,3965 4888.68,4095 v1(4960,4095)
  Bottom Layer w10: v1(4620,3425) 4960,3765 v1(4960,4095)
NetBridge_9: Bridge.9 R3.2 | length 211
  Top Layer w10: Bridge.9 4600.51,3874.49 4641.99,3833.01 4658.15,3833.01 4682.76,3808.4 R3.2
NetC3_1: C3.1 EN.1 | length 954.4
  Top Layer w10: C3.1 5040.94,3418.57 5105,3354.51 5105,2920 5030,2845 5030,2665.5 5063.43,2632.08 EN.1@5063.43,2541.54
NetC3_2: C3.2 MC.3 R1.1 | length 2424
  Top Layer w10: v1(3460,3330) 3569.96,3330 MC.3 ; R1.1@4945,3125 4966.17,3146.17 5001.37,3146.17 5035,3179.8 5035,3315 ; v1(4945,3250) 4981.33,3286.33 5006.33,3286.33 5035,3315 ; C3.2 5035,3315
  Bottom Layer w10: v1(3460,3330) 4000,2790 4485,2790 v1(4945,3250)
NetC5_1: C5.1 L1.1 USB.1 | length 1184.3
  Top Layer w10: C5.1 4945.55,3630 ; USB.1 4995,3679.45 4945.55,3630 ; L1.1 5150,2866.61 5150,3425.55 4945.55,3630
NetConnector1_1: Connector1.1 Connector1.3 Connector1.5 Connector2.4 L1.2 | length 6455.9
  Top Layer w10: v1(2885,1885) 2790.08,1979.92 2790.08,2792.81 2984.17,2986.91 2984.17,3062.17 3006.73,3084.72 Connector1.5 3067.76,3144.22 2964.17,3247.8 2964.17,3435.87 Connector1.3@3006.73,3478.43 ; Connector1.3 Connector1.3@3006.73,3478.43 ; Connector2.4 4008.93,4187.24 3865.35,4330.83 3230.68,4330.83 3137.56,4237.7 3137.56,3894.02 3115.67,3872.13 Connector1.1 3006.73,3872.13 2964.17,3829.57 2964.17,3615.02 2984.17,3595.02 2984.17,3500.98 Connector1.3@3006.73,3478.43 ; v1(5085,2660) L1.2
  Bottom Layer w10: v1(2885,1885) 3660,2660 v1(5085,2660)
NetConnector1_2: Connector1.2 Connector1.4 Connector1.6 Connector2.5 | length 2492.3
  Top Layer w10: Connector1.6 3128.78,2887.87 3151.34,2910.43 3151.34,3004.46 3171.34,3024.46 3171.34,3118.5 3067.76,3222.08 Connector1.4 3128.78,3281.57 3151.34,3304.13 3151.34,3398.17 3171.34,3418.17 3171.34,3512.2 3067.76,3615.78 Connector1.2 3128.78,3675.28 3195.15,3741.65 3195.15,4267.01 3238.97,4310.83 3688.5,4310.83 3728.5,4270.83 3849.02,4270.83 3871.57,4248.27 Connector2.5
NetConnector2_1: Connector2.1 MC.8 | length 4658.8
  Top Layer w10: v1(3025,4515) 3643.77,4515 3653.77,4525 4261.72,4525 4599.48,4187.24 Connector2.1 ; v1(3215,2655) 3270,2600 3468.26,2600 3626.85,2758.59 3626.85,3056.45 3613.5,3069.8 3585.2,3069.8 MC.8
  Bottom Layer w10: v1(3025,4515) 3025,4366.57 2930,4271.57 2930,2940 v1(3215,2655)
NetConnector2_2: Connector2.2 MC.7 | length 3114.4
  Top Layer w10: v1(3025,4310) 3025,4385 3105,4465 4124.87,4465 4402.63,4187.24 Connector2.2 ; v1(3385,3235) 3474.76,3145.24 3559.76,3145.24 MC.7
  Bottom Layer w10: v1(3025,4310) 3025,4266.57 3385,3906.57 v1(3385,3235)
NetConnector2_3: Connector2.3 MC.9 | length 3001.7
  Top Layer w10: v1(3025,4210) 3081.57,4210 3222.4,4350.83 4092.46,4350.83 4172.46,4270.83 4242.72,4270.83 4265.28,4248.27 Connector2.3 ; v1(3385,3020) 3559.96,3020 MC.9
  Bottom Layer w10: v1(3025,4210) 2975,4160 2975,3385 3340,3020 v1(3385,3020)
NetLEDG_2: LEDG.2 RG.1 | length 994.9
  Bottom Layer w10: RG.1 2775.91,1629.29 2895.2,1510 LEDG.2
NetLEDR_2: LEDR.2 RR.1 | length 1339.5
  Bottom Layer w10: RR.1 2925,1577.24 2953.25,1549 4161,1549 LEDR.2
NetMC_11: MC.11 RR.2 | length 1622.5
  Top Layer w10: v1(3450,2935) 3570,2935 MC.11
  Bottom Layer w10: RR.2 2914.17,1726.1 2897.52,1742.76 2897.52,1795.9 2845,1848.42 2845,2089.21 3450,2694.21 v1(3450,2935)
NetMC_12: MC.12 RG.2 | length 1657.6
  Top Layer w10: v1(3335,2880) 3569.96,2880 MC.12
  Bottom Layer w10: RG.2 2770,2179.17 2999.63,2408.8 3025.37,2408.8 3335,2718.43 v1(3335,2880)
NetMC_23: MC.23 R5.2 | length 965.1
  Top Layer w10: R5.2 3655,2155.71 4069.41,2570.12 4069.41,2730.43 MC.23
NetMC_24: MC.24 R6.2 | length 801.9
  Top Layer w10: MC.24 4141.17,2734.1 R6.2
NetMC_25: MC.25 R4.2 | length 1536.5
  Top Layer w10: R4.2 4040.12,1730 4207.4,1897.28 4207.4,2769.8 4220.12,2782.52 MC.25
NetR2_1: R2.1 USB.3 | length 296.1
  Top Layer w10: R2.1 4907.24,3926.6 4956.38,3877.46 4956.38,3757.88 4980.91,3733.35 5010.98,3733.35 USB.3
NetR3_1: R3.1 USB.2 | length 155.9
  Top Layer w10: R3.1 4907.24,3731.6 4931.85,3706.99 4961.02,3706.99 4962.96,3705.04 USB.2
pads on no net: *.5 Boot. Boot.3 Boot.4 Boot.5 Boot.6 Bridge.2 Bridge.6 Bridge.7 Bridge.14 Bridge.15 Bridge.16 Connector1.M1 Connector1.M2 Connector2.M1 Connector2.M2 EN. EN.3 EN.4 EN.5 EN.6 MC.4 MC.5 MC.6 MC.10 MC.13 MC.14 MC.16 MC.17 MC.18 MC.19 MC.20 MC.21 MC.22 MC.27 MC.28 MC.32 MC.33 MC.36 USB.4

## Text inside footprints (layer, text, board x,y; h text height)
USB: Mechanical 1 "PCB EDGE" at 5181.02,3447.17 h11.81 r90